# Altium PCB PCB1.PcbDoc
Units mil, origin at the board's own origin, x right, y up, seen from the top; angles counter-clockwise.
Board outline 6000 x 4000 mil, 2 copper layers (Top Layer, Bottom Layer); 79 components, 87 nets, 342 pads, 0 vias.
Unrouted connection lines stored in the file: 223.
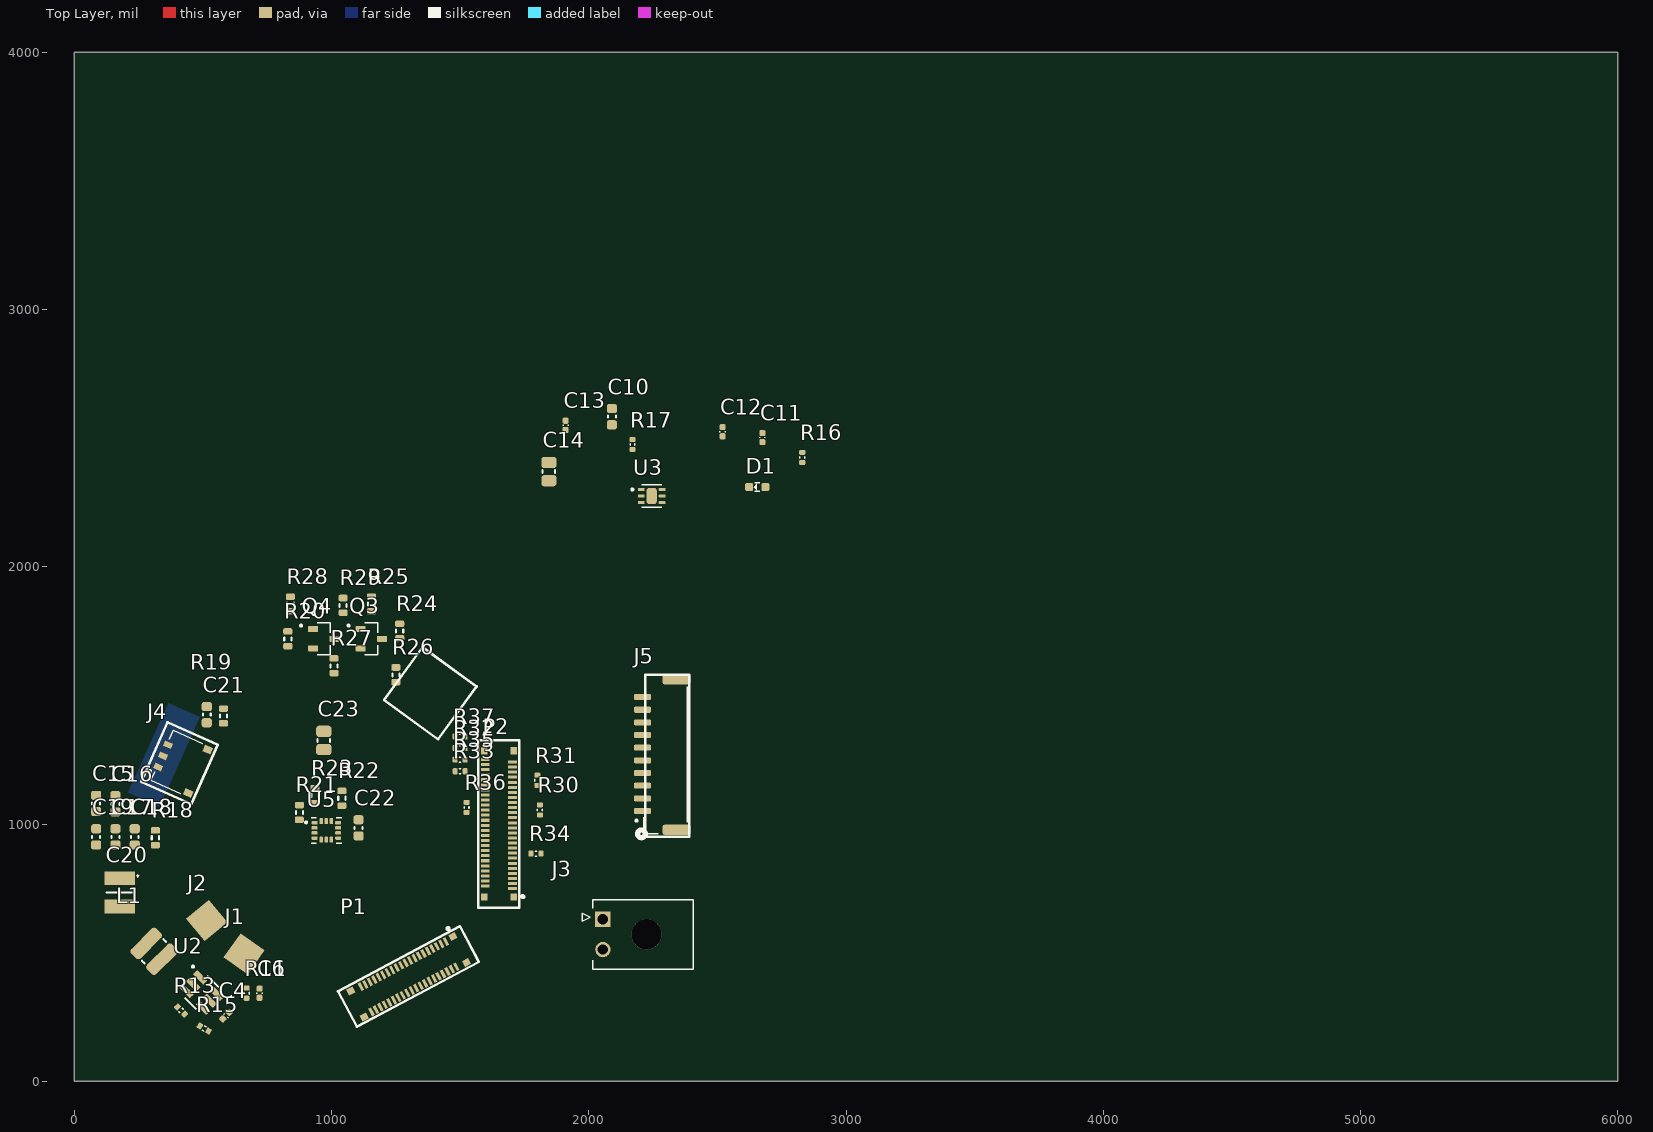
[diagram p0: Top Layer view]
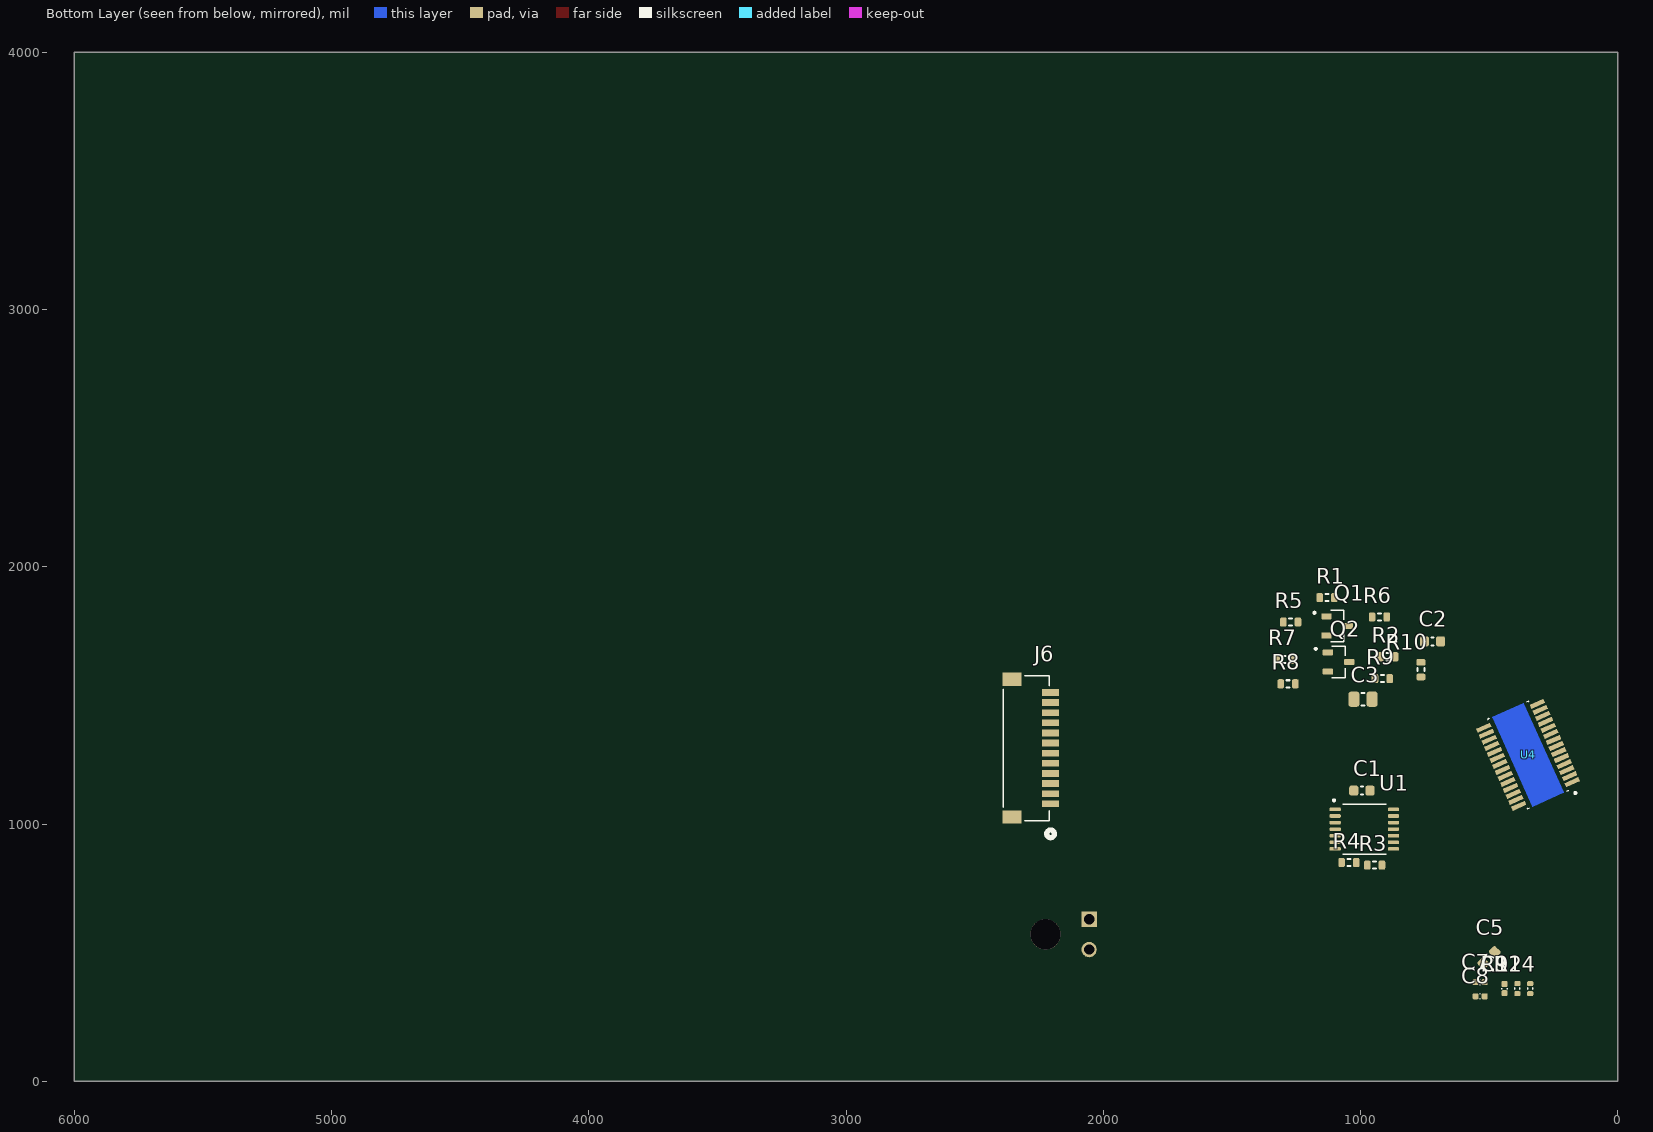
[diagram p1: Bottom Layer view, seen from below]

## Layer stack, top to bottom
Top Solder: solder mask 0.4, Solder Resist, Dk 3.5
Top Layer: signal copper 1.4
Dielectric 1: dielectric 12.6, FR-4, Dk 4.8
Bottom Layer: signal copper 1.4
Bottom Solder: solder mask 0.4, Solder Resist, Dk 3.5

## Board outline
0,0 6000,0 6000,4000 0,4000

## Design rules (kind name [scope] priority, off if disabled: settings)
Clearance [All] p1: gap=10 ignorepadtopadclearanceinfootprint=FALSE except(0: Arc-Hole Track-Hole SMDPad-Hole THPad-Hole Via-Hole Fill-Hole Poly-Hole Region-Hole Text-Hole)
DiffPairsRouting [All] p1: maxlimit=10 minlimit=10 mostfreqgap=10 toplayer_minwidth=15 toplayer_maxwidth=15 toplayer_prefwidth=15 bottomlayer_minwidth=15 bottomlayer_maxwidth=15 bottomlayer_prefwidth=15 maxuncoupledlength=500
PolygonConnect [All] p1: connectstyle=Relief reliefconductorwidth=10 reliefentries=4 polygonreliefangle="90 Angle" airgapwidth=10
RoomDefinition PWR [InComponentClass('PWR')] p1: confinementstyle=ConfineIn formatcopy=TRUE lockcomponents=FALSE outline 1245,2857.72 2900,2857.72 2900,3767.72 1245,3767.72
RoutingVias [All] p1: holewidth=28 width=50 viastyle="Through Hole" minholewidth=28 minwidth=50 maxholewidth=28 maxwidth=50
SolderMaskExpansion [All] p1: expansion=4 istentingtop=FALSE
Width [All] p1: maxlimit=10 minlimit=10 preferedwidth=10
29 further rules are at their usual default settings.

## Classes and differential pairs
component class PWR: C4 C5 C6 C7 C8 C9 C10 C11 C12 C13 C14 D1 J1 J2 J3 L1 R11 R12 R13 R14 R15 R16 R17 U2 U3
component class IMU: C22 C23 Q3 Q4 R20 R21 R22 R23 R24 R25 R26 R27 R28 R29 U5
component class Encoder: C1 C2 C3 Q1 Q2 R1 R2 R3 R4 R5 R6 R7 R8 R9 R10 U1
component class Driver: C15 C16 C17 C18 C19 C20 C21 J4 R18 R19 U4
component class Connector: J5 J6 P1 P2 R30 R31 R32 R33 R34 R35 R36 R37
differential pair ETHE2D_RX: +ETHE2D_RX_P -ETHE2D_RX_N
differential pair ETHE2C_TX: +ETHE2C_TX_P -ETHE2C_TX_N
differential pair ETHE2_TX: +ETHE2_TX_P -ETHE2_TX_N
differential pair ETHE2_RX: +ETHE2_RX_P -ETHE2_RX_N
differential pair ETHE1_TX: +ETHE1_TX_P -ETHE1_TX_N
differential pair ETHE1_RX: +ETHE1_RX_P -ETHE1_RX_N

## Components (designator, comment, footprint, x,y, rotation, side; value= is the part's Value field where it differs from the comment)
C1 "C0603C104M5RACTU" CAP0603 994.5,1130 r180 bottom
C2 "C0603C104M5RACTU" CAP0603 720,1710 r180 bottom
C3 "CL21A476MQYNNNE" CAP0805 990,1485 r180 bottom
C4 "CC0402KRX5R9BB104" CAP0402 590,255 r45 top
C5 "GRM188R6YA106MA73D" CAP0603 500,480 r135 bottom
C6 "CC0402KRX5R9BB104" CAP0402 720,342.28 r270 top
C7 "GRM158R61A226ME15D" CAP0402 535,385 r180 bottom
C8 "GRM158R61A226ME15D" CAP0402 535,330 r180 bottom
C9 "75pF" CAP0402 440,360 r90 bottom
C10 "GRM188R6YA106MA73D" CAP0603 2090,2583.5 r90 top
C11 "CC0402KRX5R9BB104" CAP0402 2675,2502.28 r90 top
C12 "CC0402KRX5R9BB104" CAP0402 2520,2525 r90 top
C13 "GRM158R61A226ME15D" CAP0402 1910,2550 r90 top
C14 "CL21A107MQYNNWE" CAP0805 1845,2370 r90 top
C15 "C0603C104M5RACTU" CAP0603 85,1080 r90 top
C16 "C0603C103M5RACTU" CAP0603 160,1078.5 r270 top
C17 "C0603C104M5RACTU" CAP0603 160,950 r90 top
C18 "C0603C104M5RACTU" CAP0603 235,950 r90 top
C19 "C0603C104M5RACTU" CAP0603 85,950 r90 top
C20 "T55B106M035C0200" T55B106M035C0200 180,735 r0 top
C21 "C0603C104M5RACTU" CAP0603 515,1425 r90 top
C22 "C0603C104M5RACTU" CAP0603 1105,985 r90 top
C23 "CL21A476MQYNNNE" CAP0805 970,1325 r90 top
D1 "SML-310MTT86" "LED0603 RED" 2655,2310 r0 top
J1 "CON1" "ESC PAD 3X4"#1 660,495 r0 top
J2 "CON1" "ESC PAD 3X4"#2 515,625 r0 top
J3 "2157601002" MOLEX_2157601002 2055,630 r90 top
J4 "BM03B-ACHSS-GAN-TF" BM03B-ACHSS-GAN-TF 413.89,1233.8 r66 top locked
J5 "SM10B-GHS-TB(LF)(SN);-" SM10B-GHS-TB(LF)(SN) 2275,1270 r90 top
J6 "SM12B-SRSS-TB(LF)(SN)" CONN_SM12B-SRSS-TBLFSN_JST 2300,1295 r270 bottom
L1 "SRN3012BTA-100M" SRN3012BTA-100M 310,505 r135 top
P1 "XSLS00-40-A" XSXL40 1300,410 r28 top locked
P2 "XSLS00-52-B" XSXL52 1655,1000 r90 top locked
Q1 "BSS138" BSS138 1090.31,1770 r180 bottom
Q2 "BSS138" BSS138 1085.31,1630 r180 bottom
Q3 "BSS138" BSS138 1155,1720 r0 top
Q4 "BSS138" BSS138 970,1720 r0 top
R1 "RES0603" RES0603 1130,1880 r180 bottom value=2.2kR
R2 "RES0603" RES0603 893.54,1650 r180 bottom value=2.2kR
R3 "RES0603" RES0603 945,840 r180 bottom value=4.7kR
R4 "RES0603" RES0603 1045,850 r180 bottom value=4.7kR
R5 "2.2k" RES0603 1271.46,1785 r180 bottom
R6 "MCR03EZPJ100" RES0603 926.46,1805 r180 bottom
R7 "2.2k" RES0603 1296.46,1640 r180 bottom
R8 "2.2k" RES0603 1281.46,1545 r180 bottom
R9 "MCR03EZPJ100" RES0603 915,1565 r180 bottom
R10 "2.2k" RES0603 765,1600 r90 bottom
R11 "511K" RES0402 670,342.28 r90 top
R12 "49.9R" RES0402 390,360 r270 bottom
R13 "105K" RES0402 415,275 r135 top
R14 "100K" RES0402 340,360 r90 bottom
R15 "13.3K" RES0402 505,205 r330 top
R16 "RT0402FRE07510RL" RES0402 2830,2425 r90 top
R17 "10K" RES0402 2170,2475 r90 top
R18 "RC0603JR-074K7L" RES0603 315,946.46 r90 top
R19 "RC0603JR-074K7L" RES0603 580,1420 r90 top
R20 "2.2k" RES0603 830,1720 r90 top
R21 "2.2k" RES0603 875,1045 r90 top
R22 "1k" RES0603 1040,1100 r90 top
R23 "RC0603JR-074K7L" RES0603 935,1110 r90 top
R24 "2.2k" RES0603 1265,1750 r90 top
R25 "RES0603" RES0603 1155,1855 r90 top value=10R
R26 "2.2k" RES0603 1250,1580 r90 top
R27 "2.2k" RES0603 1010,1615 r90 top
R28 "RES0603" RES0603 840,1855 r90 top value=10R
R29 "2.2k" RES0603 1045,1850 r90 top
R30 "RES0402" RES0402 1810,1054.68 r90 top value=0mR
R31 "RES0402" RES0402 1800,1170 r90 top value=0mR
R32 "RES0402" RES0402 1500,1295 r180 top value=0mR
R33 "RES0402" RES0402 1500,1205 r0 top value=0mR
R34 "RES0402" RES0402 1794.68,885 r180 top value=0mR
R35 "RES0402" RES0402 1500,1250 r0 top value=0mR
R36 "RES0402" RES0402 1525,1064.68 r90 top value=0mR
R37 "RES0402" RES0402 1500,1340 r0 top value=0mR
U1 "AS5048B-HTSP-500" AS5048B-HTSP-500 985,980 r180 bottom
U2 "TPS54302DDCR" TPS563200DDCR 495,345 r315 top
U3 "TLV76733DRVR" TLV76733DRVR 2244.65,2275 r0 top
U4 "DRV8313PWP" DRV8313PWP 345.11,1263.35 r336 bottom
U5 "ICM-42688-P" ICM-42688-P 980,975 r0 top

## Footprints (in the part's own frame and the unit in brackets; to place one, negate y for a bottom-side part, rotate by r counter-clockwise, add the part's x,y. Pads: shape width x height; smd on the part's side, far side on the other; paste and mask are expansions set on the pad)
AS5048B-HTSP-500 [mm]
  rrect50% 1.1x0.35 smd mask+0.051: 1(-2.876,1.95) 2(-2.876,1.3) 3(-2.876,0.65) 4(-2.876,0) 5(-2.876,-0.65) 6(-2.876,-1.3) 7(-2.876,-1.95) 8(2.876,-1.95) 9(2.876,-1.3) 10(2.876,-0.65) 11(2.876,0) 12(2.876,0.65) 13(2.876,1.3) 14(2.876,1.95)
  silkscreen extent -3.07,-2.45 2.15,2.92, body extent -3.2,-2.5 3.2,2.5, height 1.2
BM03B-ACHSS-GAN-TF [mm]
  rect 0.6x0.85 smd: 1(-1.188,1.921) 2(0.012,1.921) 3(1.212,1.921)
  rect 0.7x0.85 smd: 4(2.362,-1.854) 5(-2.338,-1.854)
  silkscreen extent -2.69,-1.18 2.71,2.57, body extent -2.69,-2.88 2.71,2.05, height 1.45
BSS138 [mm]
  rrect25% 1x0.6 smd: 1(-1.06,0.95) 2(-1.06,-0.95) 3(1.06,0)
  silkscreen extent -2.35,-1.57 0.65,1.57, body extent -1.2,-1.45 1.2,1.45, height 1.11
CAP0402 [mm]
  rrect50% 0.6x0.6 smd mask+0.05: 1(0.45,0) 2(-0.45,0)
  silkscreen extent -0.04,-0.25 0.04,0.25, body extent -0.5,-0.25 0.5,0.25, height 0.55
CAP0603 [mm]
  rrect50% 0.9x1 smd mask+0.05: 1(-0.8,0) 2(0.8,0)
  silkscreen extent -0.1,-0.39 0.1,0.39, body extent -0.8,-0.4 0.8,0.4, height 0.8
CAP0805 [mm]
  rrect50% 1.1x1.5 smd mask+0.05: 1(-0.9,0) 2(0.9,0)
  silkscreen extent -0.15,-0.62 0.15,0.61, body extent -1,-0.62 1,0.63, height 0.9
CONN_SM12B-SRSS-TBLFSN_JST [mil]
  rect 26x65 smd paste+0 mask+0: 1(216.54,95.33) 2(177.17,95.33) 3(137.8,95.33) 4(98.43,95.33) 5(59.06,95.33) 6(19.69,95.33) 7(-19.68,95.33) 8(-59.06,95.33) 9(-98.43,95.33) 10(-137.8,95.33) 11(-177.17,95.33) 12(-216.54,95.33)
  rect 51x75 smd paste+0 mask+0: 13(-267.72,-54.87) 14(267.72,-54.87)
  silkscreen extent -282,-90 348,110, body extent -277,-92 275,103, height 116
DRV8313PWP [mm]
  rrect20% 1.5x0.45 smd mask+0: 1(-2.87,4.069) 2(-2.87,3.419) 3(-2.87,2.769) 4(-2.87,2.119) 5(-2.87,1.469) 6(-2.87,0.819) 7(-2.87,0.169) 8(-2.87,-0.481) 9(-2.87,-1.131) 10(-2.87,-1.781) 11(-2.87,-2.431) 12(-2.87,-3.081) 13(-2.87,-3.731) 14(-2.87,-4.381) 15(2.93,-4.381) 16(2.93,-3.731) 17(2.93,-3.081) 18(2.93,-2.431) 19(2.93,-1.781) 20(2.93,-1.131) 21(2.93,-0.481) 22(2.93,0.169) 23(2.93,0.819) 24(2.93,1.469) 25(2.93,2.119) 26(2.93,2.769) 27(2.93,3.419) 28(2.93,4.069)
  rect 0.1x0.1 smd paste-1 mask+0: 29(0.03,-0.156)
  Top Layer region: 1.688,4.693 1.69,4.693 1.693,4.692 1.695,4.692 1.698,4.691 1.7,4.69 1.703,4.689 1.705,4.687 1.707,4.686 1.709,4.684 1.711,4.683 1.713,4.681 1.715,4.679 1.717,4.677 1.719,4.675 1.72,4.673 1.722,4.671 1.723,4.669 1.725,4.667 1.726,4.664 1.727,4.662 1.728,4.659 1.728,4.657 1.729,4.654 1.729,4.652 1.73,4.649 1.73,4.647 1.73,4.644 1.73,-4.956 1.73,-4.959 1.73,-4.961 1.729,-4.964 1.729,-4.966 1.728,-4.969 1.728,-4.971 1.727,-4.974 1.726,-4.976 1.725,-4.979 1.723,-4.981 1.722,-4.983 1.72,-4.985 1.719,-4.987 1.717,-4.989 1.715,-4.991 1.713,-4.993 1.711,-4.995 1.709,-4.996 1.707,-4.998 1.705,-4.999 1.703,-5.001 1.7,-5.002 1.698,-5.003 1.695,-5.004 1.693,-5.004 1.69,-5.005 1.688,-5.005 1.685,-5.006 -1.625,-5.006 -1.628,-5.005 -1.63,-5.005 -1.633,-5.004 -1.635,-5.004 -1.638,-5.003 -1.64,-5.002 -1.643,-5.001 -1.645,-4.999 -1.647,-4.998 -1.649,-4.996 -1.651,-4.995 -1.653,-4.993 -1.655,-4.991 -1.657,-4.989 -1.659,-4.987 -1.66,-4.985 -1.662,-4.983 -1.663,-4.981 -1.665,-4.979 -1.666,-4.976 -1.667,-4.974 -1.668,-4.971 -1.668,-4.969 -1.669,-4.966 -1.669,-4.964 -1.67,-4.961 -1.67,-4.959 -1.67,-4.956 -1.67,4.644 -1.67,4.647 -1.67,4.649 -1.669,4.652 -1.669,4.654 -1.668,4.657 -1.668,4.659 -1.667,4.662 -1.666,4.664 -1.665,4.667 -1.663,4.669 -1.662,4.671 -1.66,4.673 -1.659,4.675 -1.657,4.677 -1.655,4.679 -1.653,4.681 -1.651,4.683 -1.649,4.684 -1.647,4.686 -1.645,4.687 -1.643,4.689 -1.64,4.69 -1.638,4.691 -1.635,4.692 -1.633,4.692 -1.63,4.693 -1.628,4.693 -1.625,4.694 1.685,4.694
  silkscreen extent -2.81,-5.01 2.23,5.28, body extent -3.17,-5.01 3.23,4.69, height 1.2
"ESC PAD 3X4"#1 [mm]
  rect 2.9x2.9 smd rot 55: 1(0,0)
"ESC PAD 3X4"#2 [mm]
  rect 2.9x2.9 smd rot 40: 1(0,0)
ICM-42688-P [mm]
  rrect50% 0.59x0.35 smd mask+0.04: 1(-1.165,0.75) 2(-1.165,0.25) 3(-1.165,-0.25) 4(-1.165,-0.75) 8(1.165,-0.75) 9(1.165,-0.25) 10(1.165,0.25) 11(1.165,0.75)
  rrect50% 0.35x0.59 smd mask+0.04: 5(-0.5,-0.915) 6(0,-0.915) 7(0.5,-0.915) 12(0.5,0.915) 13(0,0.915) 14(-0.5,0.915)
  silkscreen extent -2.1,-1.25 1.5,1.25, body extent -1.5,-1.25 1.5,1.25, height 0.97
"LED0603 RED" [mm]
  rrect50% 0.8x0.82 smd mask+0.05: 1(0.8,0) 2(-0.8,0)
  silkscreen extent -0.34,-0.4 0.26,0.4, body extent -0.8,-0.4 0.8,0.4, height 0.7
MOLEX_2157601002 [mm]
  rect 1.52x1.52 / inner round 1.52 / far side rect 1.52x1.52 hole 1.02 mask+0.076: 1(0,0)
  round 1.52 hole 1.02 mask+0.076: 2(-3,0)
  round 3 hole 3 unplated mask+0.076: ""(-1.5,-4.3)
  silkscreen extent -4.92,-8.9 1.92,2.06, body extent -3.42,-4.6 3.42,5.3, height 5.87
RES0402 [mm]
  rrect50% 0.5x0.6 smd mask+0.05: 1(-0.5,0) 2(0.5,0)
  silkscreen extent -0.08,-0.24 0.08,0.24, body extent -0.5,-0.25 0.5,0.25, height 0.35
RES0603 [mm]
  rrect50% 0.65x0.9 smd mask+0.05: 1(-0.725,0) 2(0.725,0)
  silkscreen extent -0.15,-0.35 0.15,0.35, body extent -0.8,-0.45 0.8,0.45, height 0.5
SM10B-GHS-TB(LF)(SN) [mm]
  rrect50% 0.6x1.7 smd: 1(-5.575,1.675) 2(-4.325,1.675) 3(-3.075,1.675) 4(-1.825,1.675) 5(-0.575,1.675) 6(0.675,1.675) 7(1.925,1.675) 8(3.175,1.675) 9(4.425,1.675) 10(5.675,1.675)
  rrect50% 1x2.8 smd: S1(7.425,-1.675) S2(-7.425,-1.675)
  silkscreen extent -7.82,-2.72 7.82,2.37, body extent -7.82,-6.52 7.93,2.07, height 4.37
SRN3012BTA-100M [mm]
  rrect50% 1.3x3.5 smd mask+0.051: 1(-1.1,0) 2(1.1,0)
  silkscreen extent -0.2,-1.5 0.2,1.5, body extent -1.48,-1.48 1.48,1.47, height 1.11
T55B106M035C0200 [mm]
  rect 3.02x1.35 smd: 1(-0.1,1.36) 2(-0.1,-1.42)
  silkscreen extent -1.4,-0.03 1.8,1.73, body extent -1.6,-1.88 1.4,1.82, height 2.1
TLV76733DRVR [mm]
  rrect50% 0.66x0.32 smd: 1(-1.025,0.65) 2(-1.025,0) 3(-1.025,-0.65) 4(1.025,-0.65) 5(1.025,0) 6(1.025,0.65)
  rrect50% 1x1.6 smd paste-2: 7(0,0)
  silkscreen extent -2.01,-1.13 1,1.13, body extent -1,-1 1,1, height 0.8
TPS563200DDCR [mm]
  rrect25% 1.45x0.59 smd: 1(-1.155,0.95) 2(-1.155,0) 3(-1.155,-0.95) 4(1.155,-0.95) 5(1.155,0) 6(1.155,0.95)
  silkscreen extent -2.5,-1.57 0.8,1.57, body extent -1.4,-1.45 1.4,1.45, height 1.1
XSXL40 [mm]
  rect 0.7x0.66 smd: 0(-5.786,-1.526) 0(-5.765,1.367) 0(5.653,-1.526) 0(5.67,1.37)
  rect 0.3x0.86 smd: 1(4.828,1.266) 2(4.578,-1.424) 3(4.328,1.266) 4(4.078,-1.424) 5(3.828,1.266) 6(3.578,-1.424) 7(3.328,1.266) 8(3.078,-1.424) 9(2.828,1.266) 10(2.578,-1.424) 11(2.328,1.266) 12(2.078,-1.424) 13(1.828,1.266) 14(1.578,-1.424) 15(1.328,1.266) 16(1.078,-1.424) 17(0.828,1.266) 18(0.578,-1.424) 19(0.328,1.266) 20(0.078,-1.424) 21(-0.172,1.266) 22(-0.422,-1.424) 23(-0.672,1.266) 24(-0.922,-1.424) 25(-1.172,1.266) 26(-1.422,-1.424) 27(-1.672,1.266) 28(-1.922,-1.424) 29(-2.172,1.266) 30(-2.422,-1.424) 31(-2.672,1.266) 32(-2.922,-1.424) 33(-3.172,1.266) 34(-3.422,-1.424) 35(-3.672,1.266) 36(-3.922,-1.424) 37(-4.172,1.266) 38(-4.422,-1.424) 39(-4.672,1.266) 40(-4.922,-1.424)
  silkscreen extent 5.49,2.16 5.74,2.41, body extent -6.62,-1.63 6.53,1.42, height 0.8
XSXL52 [mm]
  rect 0.7x0.66 smd: 0(-7.222,-1.346) 0(-7.205,1.549) 0(7.234,-1.344) 0(7.234,1.549)
  rect 0.3x0.86 smd: 1(-6.38,-1.242) 2(-6.13,1.448) 3(-5.88,-1.242) 4(-5.63,1.448) 5(-5.38,-1.242) 6(-5.13,1.448) 7(-4.88,-1.242) 8(-4.63,1.448) 9(-4.38,-1.242) 10(-4.13,1.448) 11(-3.88,-1.242) 12(-3.63,1.448) 13(-3.38,-1.242) 14(-3.13,1.448) 15(-2.88,-1.242) 16(-2.63,1.448) 17(-2.38,-1.242) 18(-2.13,1.448) 19(-1.88,-1.242) 20(-1.63,1.448) 21(-1.38,-1.242) 22(-1.13,1.448) 23(-0.88,-1.242) 24(-0.63,1.448) 25(-0.38,-1.242) 26(-0.13,1.448) 27(0.12,-1.242) 28(0.37,1.448) 29(0.62,-1.242) 30(0.87,1.448) 31(1.12,-1.242) 32(1.37,1.448) 33(1.62,-1.242) 34(1.87,1.448) 35(2.12,-1.242) 36(2.37,1.448) 37(2.62,-1.242) 38(2.87,1.448) 39(3.12,-1.242) 40(3.37,1.448) 41(3.621,-1.242) 42(3.871,1.448) 43(4.121,-1.242) 44(4.371,1.448) 45(4.621,-1.242) 46(4.871,1.448) 47(5.121,-1.242) 48(5.371,1.448) 49(5.621,-1.242) 50(5.871,1.448) 51(6.121,-1.242) 52(6.371,1.448)
  silkscreen extent -7.3,-2.39 -7.05,-2.14, body extent -8.08,-1.37 8.07,1.68, height 0.85

## Part data
C1 C2 C15 C17 C18 C19 C21 C22: library part CMP-00691-1, "CAP CER 0.1UF 50V X7R 0603", Capacitance=100nF, Case Code (Imperial)=0603, Case Code (Metric)=1608, Dielectric=X7R, Dielectric Material=Ceramic, Manufacturer 1=KEMET, Max Operating Temperature=125°C, Min Operating Temperature=-55°C, Package Quantity=1, Tolerance=20%, Voltage Rating=50V, Case/Package=0603, Contact Plating=Tin,Matte, Depth=0.8mm, Dissipation Factor=2.5%, Height=0.8mm, Lead Pitch=0.7mm, Length=1.6mm, Manufacturer Part Number 1=C0603C104M5RACTU, Mount="Surface Mount,PCB", Packaging="Tape and Reel", Radiation Hardening=No, REACH SVHC="No SVHC", Termination=SMD/SMT, Thickness=0.034inch, Voltage Rating (DC)=50V, Width=0.031inch
C3 C23: library part 885012107014, "CAP CER 47UF 6.3V X5R 0805", Capacitance=47uF, Case Code (Imperial)=0805, Case Code (Metric)=2012, Dielectric=X5R, Max Operating Temperature=85°C, Min Operating Temperature=-55°C, Tolerance=20%, Voltage Rating=6.3V, Case/Package=0805, Category="Ceramic Capacitors", ComponentLink1Description=http://www.farnell.com/datasheets/1958454.pdf?src-supplier=Farnell, ComponentLink1URL=http://www.farnell.com/datasheets/1958454.pdf?src-supplier=Farnell, ComponentLink2Description=http://www.farnell.com/datasheets/1958454.pdf?src-supplier=Element14, ComponentLink2URL=http://www.farnell.com/datasheets/1958454.pdf?src-supplier=Element14, ComponentLink3Description=https://katalog.we-online.de/pbs/datasheet/885012107014.pdf?src-supplier=Digi-Key, ComponentLink3URL=https://katalog.we-online.de/pbs/datasheet/885012107014.pdf?src-supplier=Digi-Key, ComponentLink4Description=http://www.farnell.com/datasheets/1958454.pdf?src-supplier=Newark, ComponentLink4URL=http://www.farnell.com/datasheets/1958454.pdf?src-supplier=Newark, Length=0.079inch, Manufacturer Part Number=CL21A476MQYNNNE, Mount="Surface Mount", Packaging="Cut Tape", Pricing 1="1=0.37000, 5=0.35200, 10=0.33000, 25=0.31900, 50=0.30900, 100=0.29800 (USD)", RoHS=Yes, RoHS Compliant=Yes, Series=WCAP-CSGP, Stock 1=3580, Supplier 1=Newark, Thickness=0.057inch, Voltage Rating (DC)=6.3V, Width=0.049inch
C4 C6 C11 C12: library part CMP-00265-1, "CAP CER 0.1UF 50V X5R 0402", Capacitance=100nF, Case/Package=0402, Dielectric=X5R, Manufacturer=Yageo, Max Operating Temperature=85°C, Min Operating Temperature=-55°C, Tolerance=10%, Voltage Rating=50V, Halogen Free="Halogen Free", Lead Free="Lead Free", Length=0.039inch, Manufacturer 1=Yageo, Manufacturer Part Number=CC0402KRX5R9BB104, Manufacturer Part Number 1=CC0402KRX5R9BB104, Mount="Surface Mount", Packaging="Tape and Reel", Thickness=0.022inch, Voltage Rating (DC)=50V, Width=0.02inch
C5 C10: library part CMP-01031-1, "CAP CER 10UF 35V X5R 0603", Capacitance=10uF, Case Code (Imperial)=0603, Case Code (Metric)=1608, Dielectric=X5R, Manufacturer 1="Murata Electronics", Max Operating Temperature=85°C, Min Operating Temperature=-55°C, Package Quantity=1, Tolerance=20%, Voltage=35V, Case/Package=0603, Composition=Ceramic, Depth=0.8mm, Height=0.8mm, Lead Free="Lead Free", Length=1.6mm, Manufacturer Part Number 1=GRM188R6YA106MA73D, Mount="Surface Mount", Number of Pins=2, Packaging="Tape and Reel", REACH SVHC="No SVHC", Termination=SMD/SMT, Thickness=0.031inch, Voltage Rating=35V, Voltage Rating (DC)=35V, Weight=0.000222oz, Width=0.031inch
C7 C8 C13: library part CMP-00520-1, "CAP CER 22UF 10V X5R 0402", Capacitance=22uF, Case Code (Imperial)=0402, Case Code (Metric)=1005, Dielectric=X5R, Manufacturer 1="TDK Corporation", Max Operating Temperature=85°C, Min Operating Temperature=-55°C, Tolerance=10%, Voltage=10V, Case/Package=0402, Depth=0.5mm, Length=1mm, Manufacturer Part Number 1=GRM158R61A226ME15D, Packaging="Tape and Reel", Radiation Hardening=No, REACH SVHC="No SVHC", Termination=SMD/SMT, Voltage Rating=10V
C9: library part CAP_Dup1_16, "CAP CER 75PF 25V C0G/NP0 0402", Dielectric Type=Capacitors, Manufacturer=YAGEO, Manufacturer PN=CC0402JRNPO9BN750, Package Size="0402 (1005 Metric)", Rated Voltage=25V, Temperature Coefficient="C0G, NP0", Tolerance=5%, CLASS=DISCRETE, PART_NUMBER=TMP-416
C14: library part CMP-00446-1, "CAP CER 100UF 6.3V X5R 0805", Capacitance=100uF, Case Code (Imperial)=0805, Case Code (Metric)=2012, Dielectric=X5R, Dielectric Material=Ceramic, Manufacturer 1="TDK Corporation", Max Operating Temperature=85°C, Min Operating Temperature=-55°C, Package Quantity=2000, Tolerance=20%, Voltage Rating=6.3V, Case/Package=0805, Composition=Ceramic, Depth=1.25mm, Height=1.25mm, Lead Free="Lead Free", Length=2mm, Manufacturer Part Number 1=CL21A107MQYNNWE, Mount="Surface Mount", Packaging="Tape and Reel", REACH SVHC="No SVHC", Termination=SMD/SMT, Thickness=0.057inch, Voltage Rating (DC)=6.3V, Weight=0.000194oz, Width=0.049inch
C16: library part CMP-00691-1, "CAP CER 10NF 50V X7R 0603", Capacitance=10nF, Case Code (Imperial)=0603, Case Code (Metric)=1608, Dielectric=X7R, Dielectric Material=Ceramic, Manufacturer 1=KEMET, Max Operating Temperature=125°C, Min Operating Temperature=-55°C, Package Quantity=1, Tolerance=20%, Voltage Rating=50V, Case/Package=0603, Contact Plating=Tin,Matte, Depth=0.8mm, Dissipation Factor=2.5%, Height=0.8mm, Lead Pitch=0.7mm, Length=1.6mm, Manufacturer Part Number 1=C0603C103M5RACTU, Mount="Surface Mount,PCB", Packaging="Tape and Reel", Radiation Hardening=No, REACH SVHC="No SVHC", Termination=SMD/SMT, Thickness=0.034inch, Voltage Rating (DC)=50V, Width=0.031inch
C20: "Capacitor", Manufacturer_Name=Vishay, Mouser Part Number=74-T55B106M035C0200, Arrow Part Number=T55B106M035C0200, Arrow Price/Stock=https://www.arrow.com/en/products/t55b106m035c0200/vishay, Datasheet Link=https://www.mouser.cn/datasheet/2/427/t55-537218.pdf, Height=2.1mm, Manufacturer_Part_Number=T55B106M035C0200, Mouser Price/Stock=https://www.mouser.co.uk/ProductDetail/Vishay-Polytech/T55B106M035C0200?qs=BZBei1rCqCCB8UyqeipbyQ%3D%3D
D1: library part CMP-01130-2, "LED GREEN CLEAR 0603 SMD", Case Code (Imperial)=0603, Case Code (Metric)=1608, Color=Green,Yellow, Forward Current=20mA, Forward Voltage=2.2V, Illumination Color=Green, Lens Color=Colorless,Clear, Manufacturer 1="Rohm Semiconductor", Max Operating Temperature=85°C, Min Operating Temperature=-30°C, Package Quantity=3000, Case/Package=0603, Dominant Wavelength=570nm, Height=0.9mm, Lead Free="Lead Free", Length=1.6mm, Lens Style=Rectangular,Clear,Diffused,Colorless, Lens Transparency=Clear, Luminous Intensity=16mcd, Manufacturer Part Number 1=SML-310MTT86, Mount="Surface Mount", Number of LEDs=1, Number of Pins=2, Packaging="Tape and Reel", Radiation Hardening=No, Test Current=20mA, Viewing Angle=140°, Wavelength=570nm, Width=0.8mm
J1 J2: "SOLDER PADS"
J3: Package=None, Availability=Unavailable, MF="{'manufacturer': u'Molex'}", MP=2157601002, Price=None
J4: "ACH Series 3 Position 1.2 mm Pitch Disconnectable Crimp Style Housing", Package=None, Availability=Unavailable, MP=BM03B-ACHSS-GAN-TF, Price=None
J5: "CONN HEADER GH SIDE 10POS 1.25MM", Color=Natural, Manufacturer=JST, Package Quantity=1, Supplier Part Number 1=455-1572-2-ND, ComponentLink1Description=http://www.jst-mfg.com/product/pdf/eng/eGH.pdf?src-supplier=Digi-Key, ComponentLink1URL=http://www.jst-mfg.com/product/pdf/eng/eGH.pdf?src-supplier=Digi-Key, Connector Type="Male Pin", Contact Plating=Tin, Fastening Type=Latch, Manufacturer Part Number=SM10B-GHS-TB(LF)(SN);-, Mount="Surface Mount", Number of Positions=10, Number of Rows=1, Packaging="Tape and Reel", Pitch=0.049inch, RoHS=Yes, Stock 1=0, Supplier 1=Digi-Key, Termination=Solder
J6: library part SM12B-SRSS-TBLFSN, "Description", Manufacturer_Name=JST, Copyright="Copyright (C) 2025 Ultra Librarian. All rights reserved.", Manufacturer_Part_Number=SM12B-SRSS-TB(LF)(SN), RefDes=RefDes, Type=Type
L1: library part SRN3012BTA-330M, "10uH", Manufacturer_Name=Bourns, Datasheet Link=https://www.bourns.com/docs/Product-Datasheets/SRN3012BTA.pdf, Geometry.Height=1.2mm, Manufacturer_Part_Number=SRN3012BTA-100M, Mouser Part Number=SRN3012BTA-100M, Mouser Price/Stock=https://www.mouser.co.uk/ProductDetail/Bourns/SRN3012BTA-330M?qs=Imq1NPwxi74rPoSZ4PPaRw%3D%3D
Q1 Q2 Q3 Q4: "N-Channel 50 V 220mA (Ta) 350mW (Ta) Surface Mount SOT-23-3", Package="SOT-23-3 Motorola", Check_prices=https://www.snapeda.com/parts/BSS138/Onsemi/view-part/?ref=eda, MF=onsemi, MP=BSS138, SnapEDA_Link=https://www.snapeda.com/parts/BSS138/Onsemi/view-part/?ref=snap
R1 R2 R3 R4 R25 R28: "RES 0805", MP="add later"
R5 R7 R8 R10 R20 R21 R24 R26 R27 R29: library part RC0603FR-072K2L, "Res Thick Film 0603 2.2K Ohm 1% 0.1W(1/10W) +/-100ppm/C Epoxy Pad SMD T/R", Case Code (Imperial)=0603, Manufacturer="Yageo Group", Max Operating Temperature=155°C, Max Power Dissipation=100mW, Min Operating Temperature=-55°C, Resistance=2.2kΩ, Temperature Coefficient=100ppm/°C, Tolerance=1%, Voltage Rating=75V, Voltage Rating (DC)=50V, Case Code (Metric)=0603, Case/Package=0603, Category="Chip SMD Resistors", China RoHS=Non-Compliant, ComponentLink1Description=https://datasheet.octopart.com:443/RC0603FR-072K2L-Yageo-datasheet-175887523.pdf?src-supplier=IHS, ComponentLink1URL=https://datasheet.octopart.com:443/RC0603FR-072K2L-Yageo-datasheet-175887523.pdf?src-supplier=IHS, ComponentLink2Description=https://datasheet.octopart.com:443/RC0603FR-072K2L-Yageo-datasheet-103092701.pdf?src-supplier=Upverter, ComponentLink2URL=https://datasheet.octopart.com:443/RC0603FR-072K2L-Yageo-datasheet-103092701.pdf?src-supplier=Upverter, ComponentLink3Description=https://datasheet.octopart.com:443/RC0603FR-072K2L-Yageo-datasheet-8328172.pdf?src-supplier=Newark, ComponentLink3URL=https://datasheet.octopart.com:443/RC0603FR-072K2L-Yageo-datasheet-8328172.pdf?src-supplier=Newark, ComponentLink4Description=https://datasheet.octopart.com:443/RC0603FR-072K2L-Yageo-datasheet-12596169.pdf?src-supplier=Newark, ComponentLink4URL=https://datasheet.octopart.com:443/RC0603FR-072K2L-Yageo-datasheet-12596169.pdf?src-supplier=Newark, ComponentLink5Description=https://datasheet.octopart.com:443/RC0603FR-072K2L-Yageo-datasheet-13691069.pdf?src-supplier=Newark, ComponentLink5URL=https://datasheet.octopart.com:443/RC0603FR-072K2L-Yageo-datasheet-13691069.pdf?src-supplier=Newark, ComponentLink6Description=https://datasheet.octopart.com:443/RC0603FR-072K2L-Yageo-datasheet-34211833.pdf?src-supplier=element14+APAC, ComponentLink6URL=https://datasheet.octopart.com:443/RC0603FR-072K2L-Yageo-datasheet-34211833.pdf?src-supplier=element14+APAC, ComponentLink7Description=https://datasheet.octopart.com:443/RC0603FR-072K2L-Yageo-datasheet-62067350.pdf?src-supplier=element14+APAC, ComponentLink7URL=https://datasheet.octopart.com:443/RC0603FR-072K2L-Yageo-datasheet-62067350.pdf?src-supplier=element14+APAC, ComponentLink8Description=https://datasheet.octopart.com:443/RC0603FR-072K2L-Yageo-datasheet-17842380.pdf?src-supplier=element14+APAC, ComponentLink8URL=https://datasheet.octopart.com:443/RC0603FR-072K2L-Yageo-datasheet-17842380.pdf?src-supplier=element14+APAC, ComponentLink9Description=https://datasheet.octopart.com:443/RC0603FR-072K2L-Yageo-datasheet-21426514.pdf?src-supplier=element14+APAC, ComponentLink9URL=https://datasheet.octopart.com:443/RC0603FR-072K2L-Yageo-datasheet-21426514.pdf?src-supplier=element14+APAC, ComponentLink10Description=https://datasheet.octopart.com:443/RC0603FR-072K2L-Yageo-datasheet-164759695.pdf?src-supplier=Future+Electronics, ComponentLink10URL=https://datasheet.octopart.com:443/RC0603FR-072K2L-Yageo-datasheet-164759695.pdf?src-supplier=Future+Electronics, ComponentLink11Description=https://datasheet.octopart.com:443/RC0603FR-072K2L-Yageo-datasheet-137700087.pdf?src-supplier=Future+Electronics, ComponentLink11URL=https://datasheet.octopart.com:443/RC0603FR-072K2L-Yageo-datasheet-137700087.pdf?src-supplier=Future+Electronics, ComponentLink12Description=https://datasheet.octopart.com:443/RC0603FR-072K2L-Yageo-datasheet-27584510.pdf?src-supplier=Future+Electronics, ComponentLink12URL=https://datasheet.octopart.com:443/RC0603FR-072K2L-Yageo-datasheet-27584510.pdf?src-supplier=Future+Electronics, ComponentLink13Description=https://datasheet.octopart.com:443/RC0603FR-072K2L-Yageo-datasheet-15599030.pdf?src-supplier=Future+Electronics, ComponentLink13URL=https://datasheet.octopart.com:443/RC0603FR-072K2L-Yageo-datasheet-15599030.pdf?src-supplier=Future+Electronics, ComponentLink14Description=https://datasheet.octopart.com:443/RC0603FR-072K2L-Yageo-datasheet-8324193.pdf?src-supplier=Future+Electronics, ComponentLink14URL=https://datasheet.octopart.com:443/RC0603FR-072K2L-Yageo-datasheet-8324193.pdf?src-supplier=Future+Electronics, ComponentLink15Description=https://datasheet.octopart.com:443/RC0603FR-072K2L-Yageo-datasheet-79472498.pdf?src-supplier=Megastar, ComponentLink15URL=https://datasheet.octopart.com:443/RC0603FR-072K2L-Yageo-datasheet-79472498.pdf?src-supplier=Megastar, ComponentLink16Description=https://datasheet.octopart.com/RC0603FR-072K2L-Yageo-datasheet-73766026.pdf, ComponentLink16URL=https://datasheet.octopart.com/RC0603FR-072K2L-Yageo-datasheet-73766026.pdf, ComponentLink17Description=https://datasheet.octopart.com:443/RC0603FR-072K2L-Yageo-datasheet-118562.pdf?src-supplier=DigiKey, ComponentLink17URL=https://datasheet.octopart.com:443/RC0603FR-072K2L-Yageo-datasheet-118562.pdf?src-supplier=DigiKey, ComponentLink18Description=https://datasheet.octopart.com:443/RC0603FR-072K2L-Yageo-datasheet-499455.pdf?src-supplier=element14, ComponentLink18URL=https://datasheet.octopart.com:443/RC0603FR-072K2L-Yageo-datasheet-499455.pdf?src-supplier=element14, ComponentLink19Description=http://sigma.octopart.com:80/rohs_statement/Yageo-company-2.pdf?src-supplier=Compliance+Statements, ComponentLink19URL=http://sigma.octopart.com:80/rohs_statement/Yageo-company-2.pdf?src-supplier=Compliance+Statements, ComponentLink20Description=http://sigma.octopart.com:80/conflict_mineral_statement/Yageo-company-3.pdf?src-supplier=Compliance+Statements, ComponentLink20URL=http://sigma.octopart.com:80/conflict_mineral_statement/Yageo-company-3.pdf?src-supplier=Compliance+Statements, Composition="Thick Film", Depth=800µm, Features="Moisture Resistant", Height=450µm, Lead Free="Lead Free", Length=1.6mm, Lifecycle Status=Production, Manufacturer Part Number=RC0603FR-072K2L, Military Standard=Not, Mount="Surface Mount", Number of Pins=2, Number of Terminals=2, Number of Terminations=2, Packaging="Tape & Reel", Power Dissipation=100mW, Power Rating=100mW, Pricing 1="5000=0.00146, 10000=0.00141, 20000=0.00136, 30000=0.00131, 40000=0.00127 (USD)", REACH SVHC=Yes, RoHS=Compliant, Schedule B="8533210045, 8533210045|8533210045|8533210045|8533210045|8533210045|8533210045|8533210045|8533210045|8533210045|8533210045|8533210045|8533210045|8533210045|8533210045|8533210045, 8533210045|8533210045|8533210045|8533210045|8533210045|8533210045|8533210045|8533210045|8533210045|8533210045|8533210045|8533210045|8533210045|8533210045|8533210045|8533210045, 8533210045|8533210045|8533210045|8533210045|8533210045|8533210045|8533210045|8533210045|8533210045|8533210045|8533210045|8533210045|8533210045|8533210045|8533210045|8533210045|8533210045", Stock 1=415000, Supplier 1=Avnet, Supplier Part Number 1=RC0603FR-072K2L, Termination=SMD/SMT, Width=800µm, Working Voltage=75V
R6 R9: library part CMP-01078-4, "RES SMD 10 OHM 5% 1/10W 0603", Case/Package=0603, Manufacturer 1="Rohm Semiconductor", Max Operating Temperature=155°C, Min Operating Temperature=-55°C, Power Rating=100mW, Resistance=10R, Temperature Coefficient=200ppm/°C, Tolerance=5%, Voltage Rating (DC)=50V, Composition="Thick Film", Contact Plating=Tin, Lead Free="Lead Free", Manufacturer Part Number 1=MCR03EZPJ100, Mount="Surface Mount"
R11: library part CMP-00299-1_1, "RES SMD 511K OHM 1% 1/16W 0402", Case Code (Imperial)=0402, Case Code (Metric)=1005, Manufacturer=Yageo, Manufacturer Part Number=RC0402FR-07511KL, Max Operating Temperature=155°C, Max Power Dissipation=63mW, Min Operating Temperature=-55°C, Package Quantity=1, Power Rating=62.5mW, Temperature Coefficient=100ppm/°C, Tolerance=1%, Voltage Rating=50V, Case/Package=0402, Composition="Thick Film", Depth=0.5mm, Features="Moisture Resistant", Height=0.016inch, Lead Free="Lead Free", Length=1mm, Manufacturer 1=Yageo, Manufacturer Part Number 1=RC0402FR-07511KL, Military Standard=Not, Number of Terminations=2, Packaging="Tape and Reel", Resistance=511K, Termination=SMD/SMT, Voltage Rating (DC)=50V, Width=0.02inch, Working Voltage=50V
R12: library part CMP-00299-1_1, "RES SMD 49.9R OHM 1% 1/16W 0402", Case Code (Imperial)=0402, Case Code (Metric)=1005, Manufacturer=Yageo, Manufacturer Part Number=RC0402FR-0749R9L, Max Operating Temperature=155°C, Max Power Dissipation=63mW, Min Operating Temperature=-55°C, Package Quantity=1, Power Rating=62.5mW, Temperature Coefficient=100ppm/°C, Tolerance=1%, Voltage Rating=50V, Case/Package=0402, Composition="Thick Film", Depth=0.5mm, Features="Moisture Resistant", Height=0.016inch, Lead Free="Lead Free", Length=1mm, Manufacturer 1=Yageo, Manufacturer Part Number 1=RC0402FR-0749R9L, Military Standard=Not, Number of Terminations=2, Packaging="Tape and Reel", Resistance=49.9R, Termination=SMD/SMT, Voltage Rating (DC)=50V, Width=0.02inch, Working Voltage=50V
R13: library part CMP-00299-1_1, "RES SMD 105K OHM 1% 1/16W 0402", Case Code (Imperial)=0402, Case Code (Metric)=1005, Manufacturer=Yageo, Manufacturer Part Number=RC0402FR-07105KL, Max Operating Temperature=155°C, Max Power Dissipation=63mW, Min Operating Temperature=-55°C, Package Quantity=1, Power Rating=62.5mW, Temperature Coefficient=100ppm/°C, Tolerance=1%, Voltage Rating=50V, Case/Package=0402, Composition="Thick Film", Depth=0.5mm, Features="Moisture Resistant", Height=0.016inch, Lead Free="Lead Free", Length=1mm, Manufacturer 1=Yageo, Manufacturer Part Number 1=RC0402FR-07105KL, Military Standard=Not, Number of Terminations=2, Packaging="Tape and Reel", Resistance=105K, Termination=SMD/SMT, Voltage Rating (DC)=50V, Width=0.02inch, Working Voltage=50V
R14: library part CMP-00299-1_1, "RES SMD 100K OHM 1% 1/16W 0402", Case Code (Imperial)=0402, Case Code (Metric)=1005, Manufacturer=Yageo, Manufacturer Part Number=RC0402FR-07100KL, Max Operating Temperature=155°C, Max Power Dissipation=63mW, Min Operating Temperature=-55°C, Package Quantity=1, Power Rating=62.5mW, Temperature Coefficient=100ppm/°C, Tolerance=1%, Voltage Rating=50V, Case/Package=0402, Composition="Thick Film", Depth=0.5mm, Features="Moisture Resistant", Height=0.016inch, Lead Free="Lead Free", Length=1mm, Manufacturer 1=Yageo, Manufacturer Part Number 1=RC0402FR-07100KL, Military Standard=Not, Number of Terminations=2, Packaging="Tape and Reel", Resistance=100K, Termination=SMD/SMT, Voltage Rating (DC)=50V, Width=0.02inch, Working Voltage=50V
R15 R17: library part CMP-00299-1_1, "RES SMD 100K OHM 1% 1/16W 0402", Case Code (Imperial)=0402, Case Code (Metric)=1005, Manufacturer=Yageo, Manufacturer Part Number=RC0402FR-07100KL, Max Operating Temperature=155°C, Max Power Dissipation=63mW, Min Operating Temperature=-55°C, Package Quantity=1, Power Rating=62.5mW, Resistance=100K, Temperature Coefficient=100ppm/°C, Tolerance=1%, Voltage Rating=50V, Case/Package=0402, Composition="Thick Film", Depth=0.5mm, Features="Moisture Resistant", Height=0.016inch, Lead Free="Lead Free", Length=1mm, Manufacturer 1=Yageo, Manufacturer Part Number 1=RC0402FR-07100KL, Military Standard=Not, Number of Terminations=2, Packaging="Tape and Reel", Termination=SMD/SMT, Voltage Rating (DC)=50V, Width=0.02inch, Working Voltage=50V
R16: library part RC0402FR-0722KL, "RES SMD 510 OHM 1% 1/16W 0402", Case Code (Imperial)=0402, Case Code (Metric)=1005, Manufacturer=Yageo, Max Operating Temperature=155°C, Max Power Dissipation=63mW, Min Operating Temperature=-55°C, Package Quantity=1, Power Rating=62.5mW, Resistance=510, Resistance Tolerance=1%, Resistor Type="Thick Film", Temperature Coefficient=100ppm/°C, Voltage Rating=50V, Case/Package=0402, Category="Chip SMD Resistors", Construction=Rectangular, Depth=0.5mm, Features="Moisture Resistant", Height=0.016inch, Lead Free="Lead Free", Length=0.039inch, Manufacturer Part Number=RT0402FRE07510RL, Military Standard=Not, Number of Terminations=2, Packaging="Tape and Reel", Pricing 1="10000=0.00100, 50000=0.00090, 300000=0.00080, 1000000=0.00080, 3000000=0.00070 (USD)", Reach SVHC Compliant=Yes, RoHS=Yes, RoHS Compliant=Yes, Series=RC, Stock 1=1010000, Supplier 1="Future Electronics", Termination=SMD/SMT, Tolerance=1%, Width=0.02inch, Working Voltage=50V
R18 R19 R23: library part CMP-01404-1, "RES SMD 4.7K OHM 5% 1/10W 0603", Case Code (Imperial)=0603, Case Code (Metric)=1608, Manufacturer 1=Yageo, Max Operating Temperature=155°C, Max Power Dissipation=100mW, Min Operating Temperature=-55°C, Resistance=4.7kR, Resistance Tolerance=5%, Resistor Type="Thick Film", Temperature Coefficient=100ppm/°C, Voltage Rating=50V, Case/Package=0603, Construction=Rectangular, Depth=0.8mm, Features="Moisture Resistant", Lead Free="Lead Free", Length=1.6mm, Manufacturer Part Number 1=RC0603JR-074K7L, Military Standard=Not, Number of Pins=2, Number of Terminations=2, Packaging="Tape and Reel", Power Rating=100mW, REACH SVHC="No SVHC", Series=RC, Size Code=0603, Termination=SMD/SMT, Tolerance=5%, Voltage Rating (DC)=50V, Width=0.8mm
R22: library part RC0603FR-072K2L, "Res Thick Film 0603 2.2K Ohm 1% 0.1W(1/10W) +/-100ppm/C Epoxy Pad SMD T/R", Case Code (Imperial)=0603, Manufacturer="Yageo Group", Max Operating Temperature=155°C, Max Power Dissipation=100mW, Min Operating Temperature=-55°C, Resistance=1kΩ, Temperature Coefficient=100ppm/°C, Tolerance=1%, Voltage Rating=75V, Voltage Rating (DC)=50V, Case Code (Metric)=0603, Case/Package=0603, Category="Chip SMD Resistors", China RoHS=Non-Compliant, ComponentLink1Description=https://datasheet.octopart.com:443/RC0603FR-072K2L-Yageo-datasheet-175887523.pdf?src-supplier=IHS, ComponentLink1URL=https://datasheet.octopart.com:443/RC0603FR-072K2L-Yageo-datasheet-175887523.pdf?src-supplier=IHS, ComponentLink2Description=https://datasheet.octopart.com:443/RC0603FR-072K2L-Yageo-datasheet-103092701.pdf?src-supplier=Upverter, ComponentLink2URL=https://datasheet.octopart.com:443/RC0603FR-072K2L-Yageo-datasheet-103092701.pdf?src-supplier=Upverter, ComponentLink3Description=https://datasheet.octopart.com:443/RC0603FR-072K2L-Yageo-datasheet-8328172.pdf?src-supplier=Newark, ComponentLink3URL=https://datasheet.octopart.com:443/RC0603FR-072K2L-Yageo-datasheet-8328172.pdf?src-supplier=Newark, ComponentLink4Description=https://datasheet.octopart.com:443/RC0603FR-072K2L-Yageo-datasheet-12596169.pdf?src-supplier=Newark, ComponentLink4URL=https://datasheet.octopart.com:443/RC0603FR-072K2L-Yageo-datasheet-12596169.pdf?src-supplier=Newark, ComponentLink5Description=https://datasheet.octopart.com:443/RC0603FR-072K2L-Yageo-datasheet-13691069.pdf?src-supplier=Newark, ComponentLink5URL=https://datasheet.octopart.com:443/RC0603FR-072K2L-Yageo-datasheet-13691069.pdf?src-supplier=Newark, ComponentLink6Description=https://datasheet.octopart.com:443/RC0603FR-072K2L-Yageo-datasheet-34211833.pdf?src-supplier=element14+APAC, ComponentLink6URL=https://datasheet.octopart.com:443/RC0603FR-072K2L-Yageo-datasheet-34211833.pdf?src-supplier=element14+APAC, ComponentLink7Description=https://datasheet.octopart.com:443/RC0603FR-072K2L-Yageo-datasheet-62067350.pdf?src-supplier=element14+APAC, ComponentLink7URL=https://datasheet.octopart.com:443/RC0603FR-072K2L-Yageo-datasheet-62067350.pdf?src-supplier=element14+APAC, ComponentLink8Description=https://datasheet.octopart.com:443/RC0603FR-072K2L-Yageo-datasheet-17842380.pdf?src-supplier=element14+APAC, ComponentLink8URL=https://datasheet.octopart.com:443/RC0603FR-072K2L-Yageo-datasheet-17842380.pdf?src-supplier=element14+APAC, ComponentLink9Description=https://datasheet.octopart.com:443/RC0603FR-072K2L-Yageo-datasheet-21426514.pdf?src-supplier=element14+APAC, ComponentLink9URL=https://datasheet.octopart.com:443/RC0603FR-072K2L-Yageo-datasheet-21426514.pdf?src-supplier=element14+APAC, ComponentLink10Description=https://datasheet.octopart.com:443/RC0603FR-072K2L-Yageo-datasheet-164759695.pdf?src-supplier=Future+Electronics, ComponentLink10URL=https://datasheet.octopart.com:443/RC0603FR-072K2L-Yageo-datasheet-164759695.pdf?src-supplier=Future+Electronics, ComponentLink11Description=https://datasheet.octopart.com:443/RC0603FR-072K2L-Yageo-datasheet-137700087.pdf?src-supplier=Future+Electronics, ComponentLink11URL=https://datasheet.octopart.com:443/RC0603FR-072K2L-Yageo-datasheet-137700087.pdf?src-supplier=Future+Electronics, ComponentLink12Description=https://datasheet.octopart.com:443/RC0603FR-072K2L-Yageo-datasheet-27584510.pdf?src-supplier=Future+Electronics, ComponentLink12URL=https://datasheet.octopart.com:443/RC0603FR-072K2L-Yageo-datasheet-27584510.pdf?src-supplier=Future+Electronics, ComponentLink13Description=https://datasheet.octopart.com:443/RC0603FR-072K2L-Yageo-datasheet-15599030.pdf?src-supplier=Future+Electronics, ComponentLink13URL=https://datasheet.octopart.com:443/RC0603FR-072K2L-Yageo-datasheet-15599030.pdf?src-supplier=Future+Electronics, ComponentLink14Description=https://datasheet.octopart.com:443/RC0603FR-072K2L-Yageo-datasheet-8324193.pdf?src-supplier=Future+Electronics, ComponentLink14URL=https://datasheet.octopart.com:443/RC0603FR-072K2L-Yageo-datasheet-8324193.pdf?src-supplier=Future+Electronics, ComponentLink15Description=https://datasheet.octopart.com:443/RC0603FR-072K2L-Yageo-datasheet-79472498.pdf?src-supplier=Megastar, ComponentLink15URL=https://datasheet.octopart.com:443/RC0603FR-072K2L-Yageo-datasheet-79472498.pdf?src-supplier=Megastar, ComponentLink16Description=https://datasheet.octopart.com/RC0603FR-072K2L-Yageo-datasheet-73766026.pdf, ComponentLink16URL=https://datasheet.octopart.com/RC0603FR-072K2L-Yageo-datasheet-73766026.pdf, ComponentLink17Description=https://datasheet.octopart.com:443/RC0603FR-072K2L-Yageo-datasheet-118562.pdf?src-supplier=DigiKey, ComponentLink17URL=https://datasheet.octopart.com:443/RC0603FR-072K2L-Yageo-datasheet-118562.pdf?src-supplier=DigiKey, ComponentLink18Description=https://datasheet.octopart.com:443/RC0603FR-072K2L-Yageo-datasheet-499455.pdf?src-supplier=element14, ComponentLink18URL=https://datasheet.octopart.com:443/RC0603FR-072K2L-Yageo-datasheet-499455.pdf?src-supplier=element14, ComponentLink19Description=http://sigma.octopart.com:80/rohs_statement/Yageo-company-2.pdf?src-supplier=Compliance+Statements, ComponentLink19URL=http://sigma.octopart.com:80/rohs_statement/Yageo-company-2.pdf?src-supplier=Compliance+Statements, ComponentLink20Description=http://sigma.octopart.com:80/conflict_mineral_statement/Yageo-company-3.pdf?src-supplier=Compliance+Statements, ComponentLink20URL=http://sigma.octopart.com:80/conflict_mineral_statement/Yageo-company-3.pdf?src-supplier=Compliance+Statements, Composition="Thick Film", Depth=800µm, Features="Moisture Resistant", Height=450µm, Lead Free="Lead Free", Length=1.6mm, Lifecycle Status=Production, Manufacturer Part Number=RC0603FR-072K2L, Military Standard=Not, Mount="Surface Mount", Number of Pins=2, Number of Terminals=2, Number of Terminations=2, Packaging="Tape & Reel", Power Dissipation=100mW, Power Rating=100mW, Pricing 1="5000=0.00146, 10000=0.00141, 20000=0.00136, 30000=0.00131, 40000=0.00127 (USD)", REACH SVHC=Yes, RoHS=Compliant, Schedule B="8533210045, 8533210045|8533210045|8533210045|8533210045|8533210045|8533210045|8533210045|8533210045|8533210045|8533210045|8533210045|8533210045|8533210045|8533210045|8533210045, 8533210045|8533210045|8533210045|8533210045|8533210045|8533210045|8533210045|8533210045|8533210045|8533210045|8533210045|8533210045|8533210045|8533210045|8533210045|8533210045, 8533210045|8533210045|8533210045|8533210045|8533210045|8533210045|8533210045|8533210045|8533210045|8533210045|8533210045|8533210045|8533210045|8533210045|8533210045|8533210045|8533210045", Stock 1=415000, Supplier 1=Avnet, Supplier Part Number 1=RC0603FR-072K2L, Termination=SMD/SMT, Width=800µm, Working Voltage=75V
R30 R31 R32 R33 R34 R35 R36 R37: "RES 0402", MP="add later"
U1: "No Description Available", Mfr_Name=AMS, RefDes=RefDes, Type=Type
U2: "4.5-V to 28-V Input, 3-A Output, EMI Friendly Synchronous Step-Down Converter", Package="SOT-23-THN-6 Texas Instruments", Availability="In Stock", Check_prices=https://www.snapeda.com/parts/TPS54302DDCR/Texas+Instruments/view-part/?ref=eda, MF="Texas Instruments", MP=TPS54302DDCR, Price=None, Purchase-URL=https://pricing.snapeda.com/search?q=TPS54302DDCR&ref=eda, SnapEDA_Link=https://www.snapeda.com/parts/TPS54302DDCR/Texas+Instruments/view-part/?ref=snap
U3: "Adjustable- and fixed-output, 1-A, 16-V, positive-voltage low-dropout (LDO) linear regulator", Package="WSON-6 Texas Instruments", Check_prices=https://www.snapeda.com/parts/TLV76733DRVR/Texas+Instruments/view-part/?ref=eda, MF="Texas Instruments", MP=TLV76733DRVR, SnapEDA_Link=https://www.snapeda.com/parts/TLV76733DRVR/Texas+Instruments/view-part/?ref=snap
U4: "65-V max, 3-A peak 3-phase motor driver", Package="HTSSOP-28 Texas Instruments", Availability="In Stock", Check_prices=https://www.snapeda.com/parts/DRV8313PWP/Texas+Instruments/view-part/?ref=eda, MF="Texas Instruments", MP=DRV8313PWP, Price=None, Purchase-URL=https://pricing.snapeda.com/search?q=DRV8313PWP&ref=eda, SnapEDA_Link=https://www.snapeda.com/parts/DRV8313PWP/Texas+Instruments/view-part/?ref=snap
U5: "Accelerometer, Gyroscope, 6 Axis Sensor Output", Package=None, Availability=Unavailable, MP=ICM-42688-P, Price=None

## Nets (pads, with @x,y where several pads share a name; then routed paths per layer and width w, separated by ;. In a path a pad name is that pad's centre, name@x,y a point inside that pad or via, vN(x,y) a via of type N, cw(c..) or ccw(c..) an arc to the next point about the centre after c; other vN are vias at no path point)
3V3: R24.2 R25.1 R27.2 R28.1
5V: R26.2 R29.2
12V: C5.1 C6.1 C15.1 C17.1 C18.1 C19.1 C20.1 J1.1 J3.1 R11.1 U2.3 U4.4 U4.11
+3V3: C2.1 C3.1 R1.1 R2.1 R3.1 R4.1 R5.2 R6.2 R8.2 R9.2 U1.12
+5V: C1.1 C7.1 C8.1 C10.1 C11.1 L1.2 R7.2 R10.2 R12.1 R17.1 U1.11 U3.6
C_Main_SWCLK: J6.12 P2.20
C_Main_SWDIO: J6.11 P2.18
C_Yaw_TIM1_CH1: P2.24 U4.27
C_Yaw_TIM1_CH2: P2.26 U4.25
C_Yaw_TIM1_CH3: P2.28 U4.23
CAM_TRIGGER: P1.23 P2.41 R32.2
CAM_TRIGGER_2: P1.28 R37.1
CAN_H: P1.37 P2.39
CAN_L: P1.35 P2.37
ETHE1_RX_N: P1.7 P2.9
ETHE1_RX_P: P1.5 P2.7
ETHE1_TX_N: P1.3 P2.3
ETHE1_TX_P: P1.1 P2.1
ETHE1C_TX_N: P1.11
ETHE1C_TX_P: P1.9
ETHE1D_RX_N: P1.15
ETHE1D_RX_P: P1.13
ETHE2_RX_N: P1.8 P2.25
ETHE2_RX_P: P1.6 P2.23
ETHE2_TX_N: P1.4 P2.19
ETHE2_TX_P: P1.2 P2.17
ETHE2C_TX_N: J5.2 P1.12
ETHE2C_TX_P: J5.1 P1.10
ETHE2D_RX_N: J5.5 P1.16
ETHE2D_RX_P: J5.4 P1.14
GND: C1.2 C2.2 C3.2 C5.2 C6.2 C7.2 C8.2 C10.2 C11.2 C12.2 C13.2 C14.2 C17.2 C18.2 C19.2 C20.2 C21.2 C22.2 C23.2 D1.1 J2.1 J3.2 J5.10 J5.S1 J5.S2 J6.1 J6.2 P1.17 P1.18 P1.29 P1.30 P1.39 P1.40 P2.5 P2.22 P2.30 P2.35 P2.36 P2.42 P2.43 P2.48 R13.2 R15.2 R23.2 U1.5 U1.6 U1.7 U1.8 U1.9 U1.10 U1.13 U2.1 U3.3 U3.5 U4.6 U4.7 U4.10 U4.12 U4.13 U4.14 U4.20 U4.21 U4.28 U4.29 U5.2 U5.3 U5.6 U5.7 U5.9 U5.10 U5.11
MCU1_Main_Left_SWCLK: J6.4 P2.4
MCU1_Main_Left_SWDIO: J6.3 P2.2
MCU1_Main_Right_SWCLK: J6.8 P2.12
MCU1_Main_Right_SWDIO: J6.7 P2.10
MCU2_Main_Left_SWCLK: J6.6 P2.8
MCU2_Main_Left_SWDIO: J6.5 P2.6
MCU2_Main_Right_SWCLK: J6.10 P2.16
MCU2_Main_Right_SWDIO: J6.9 P2.14
NetC4_1: C4.1 U2.6
NetC4_2: C4.2 L1.1 U2.2
NetC9_1: C9.1 R14.2 R15.1 U2.4
NetC9_2: C9.2 R12.2 R14.1
NetC15_2: C15.2 U4.3
NetC16_1: C16.1 U4.2
NetC16_2: C16.2 U4.1
NetC21_1: C21.1 R18.1 R19.2 U4.15 U4.16 U4.17
NetD1_2: D1.2 R16.2
NetJ4_1: J4.1 U4.5
NetJ4_2: J4.2 U4.8
NetJ4_3: J4.3 U4.9
NetJ5_6: J5.6 P2.27
NetJ5_7: J5.7 P2.29
NetP1_19: P1.19 R30.2
NetP2_32: P2.32 R34.1
NetP2_34: P2.34 R36.1
NetP2_44: P2.44 R33.2
NetP2_45: P2.45 Q3.3 R26.1
NetP2_46: P2.46 R35.2
NetP2_47: P2.47 Q4.3 R29.1
NetP2_49: P2.49 Q1.3 R7.1
NetP2_50: P2.50 R32.1
NetP2_51: P2.51 Q2.3 R10.1
NetP2_52: P2.52 R37.2
NetQ1_1: Q1.1 R6.1
NetQ1_2: Q1.2 R2.2 R5.1 U1.1
NetQ2_1: Q2.1 R9.1
NetQ2_2: Q2.2 R1.2 R8.1 U1.2
NetQ3_1: Q3.1 R25.2
NetQ4_1: Q4.1 R28.2
NetR3_2: R3.2 U1.4
NetR4_2: R4.2 U1.3
NetR11_2: R11.2 R13.1 U2.5
NetR17_2: R17.2 U3.4
NetR18_2: R18.2 U4.22 U4.24 U4.26
NetR19_1: R19.1 U4.18
NetR22_1: R22.1 U5.12
NetR23_1: R23.1 U5.1
PWM_1: P1.25 P2.15 R34.2
PWM_2: P1.26 P2.31 R35.1
RX_AI: P2.40 R30.1
SBUS_1: P1.27 P2.21 R36.2
SBUS_2: P1.24 P2.33 R33.1
SCL_IMU1: Q4.2 R21.1 R27.1 U5.13
SDA_IMU1: Q3.2 R20.1 R24.1 U5.14
TX_AI: P2.38 R31.1
VDD: C12.1 C13.1 C14.1 C22.1 C23.1 R16.1 R20.2 R21.2 R22.2 U3.1 U3.2 U5.5 U5.8
pads on no net: J3. J4.4 J4.5 J5.3 J5.8 J5.9 J6.13 J6.14 P1.0 P1.20 P1.21 P1.22 P1.31 P1.32 P1.33 P1.34 P1.36 P1.38 P2.0 P2.11 P2.13 R31.2 U1.14 U3.7 U4.19 U5.4

## Silkscreen, mask and mechanical layers (free items; w line width, h text height)
Top Overlay:
  lines w10: 259.54,1164.37 455.33,1077.2 558.09,1308.01 362.3,1395.18 259.54,1164.37 ; 1025.28,350.31 1499.21,602.31 1572.85,463.81 1098.91,211.81 1025.28,350.31 ; 1204.15,1481.91 1414.49,1329.08 1563.8,1534.58 1353.46,1687.41 1204.15,1481.91 ; 1570,675 1730,675 1730,1325 1570,1325 1570,675 ; 2220,950 2390,950 2390,1580 2220,1580 2220,950
Mechanical 1:
  drawing of 1953 lines, arcs and shapes, not listed
Mechanical 13:
  lines w0.5: 2590.63,437.38 2590.63,405.89 2602.44,405.89 2656.99,437.38 ; 2590.63,707.07 2590.63,738.56 2602.44,738.56 2656.99,707.07 ; 2763.86,445.26 2407.56,445.26 ; 2763.86,699.19 2407.56,699.19 ; 2407.56,445.26 2407.56,699.19 ; 2407.56,445.26 2407.56,437.38 2763.86,437.38 ; 2407.56,699.19 2407.56,707.07 2763.86,707.07 ; 2763.86,437.38 2763.86,468.88 ; 2763.86,437.38 2787.48,437.38 2787.48,468.88 ; 2763.86,468.88 2763.86,675.57 ; 2763.86,468.88 2787.48,468.88 ; 2763.86,675.57 2763.86,707.07 ; 2763.86,675.57 2787.48,675.57 ; 2763.86,707.07 2787.48,707.07 2787.48,675.57 ; 2787.48,468.88 2787.48,675.57

## Text inside footprints (layer, text, board x,y; h text height)
J3: Mechanical 13 "PTH D1.02 MIN" at 2558.94,436.1 h19.68 r90; Mechanical 13 "NPTH D3.00+/-0.05" at 2594.37,436.1 h19.68 r90